# Altium PCB dongle.PcbDoc
Units mm, origin at the board's own origin, x right, y up, seen from the top; angles counter-clockwise.
Board outline 19 x 25 mm, 4 copper layers (Top Layer, Int1 (GND), Int2 (PWR), Bottom Layer), stack 1.586 mm thick; 12 components, 11 nets, 64 pads, 74 vias.
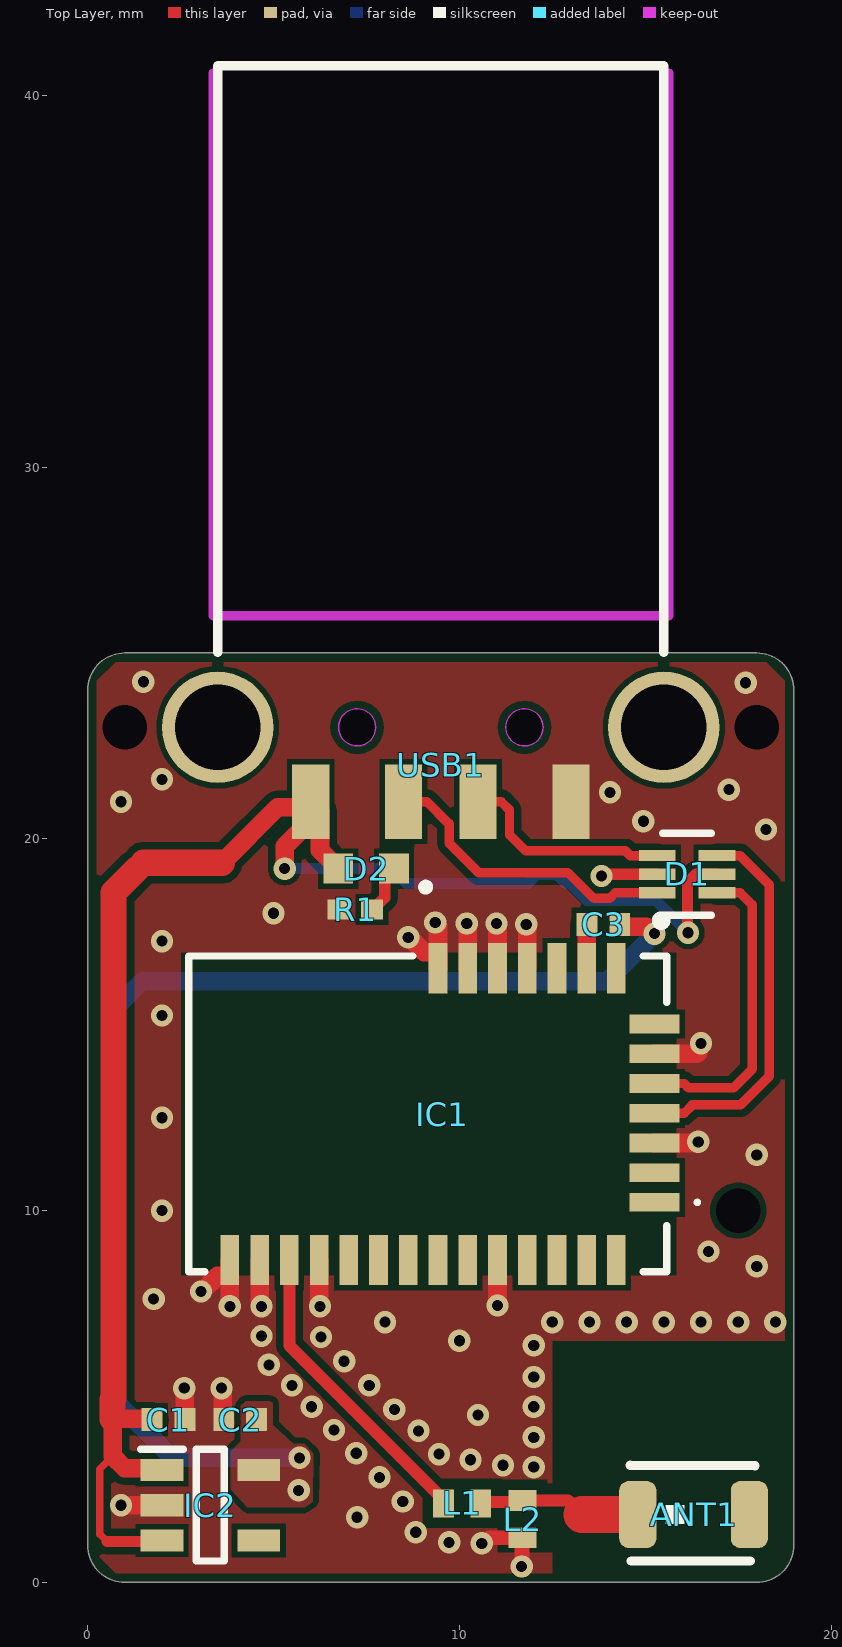
[diagram p0: Top Layer view]
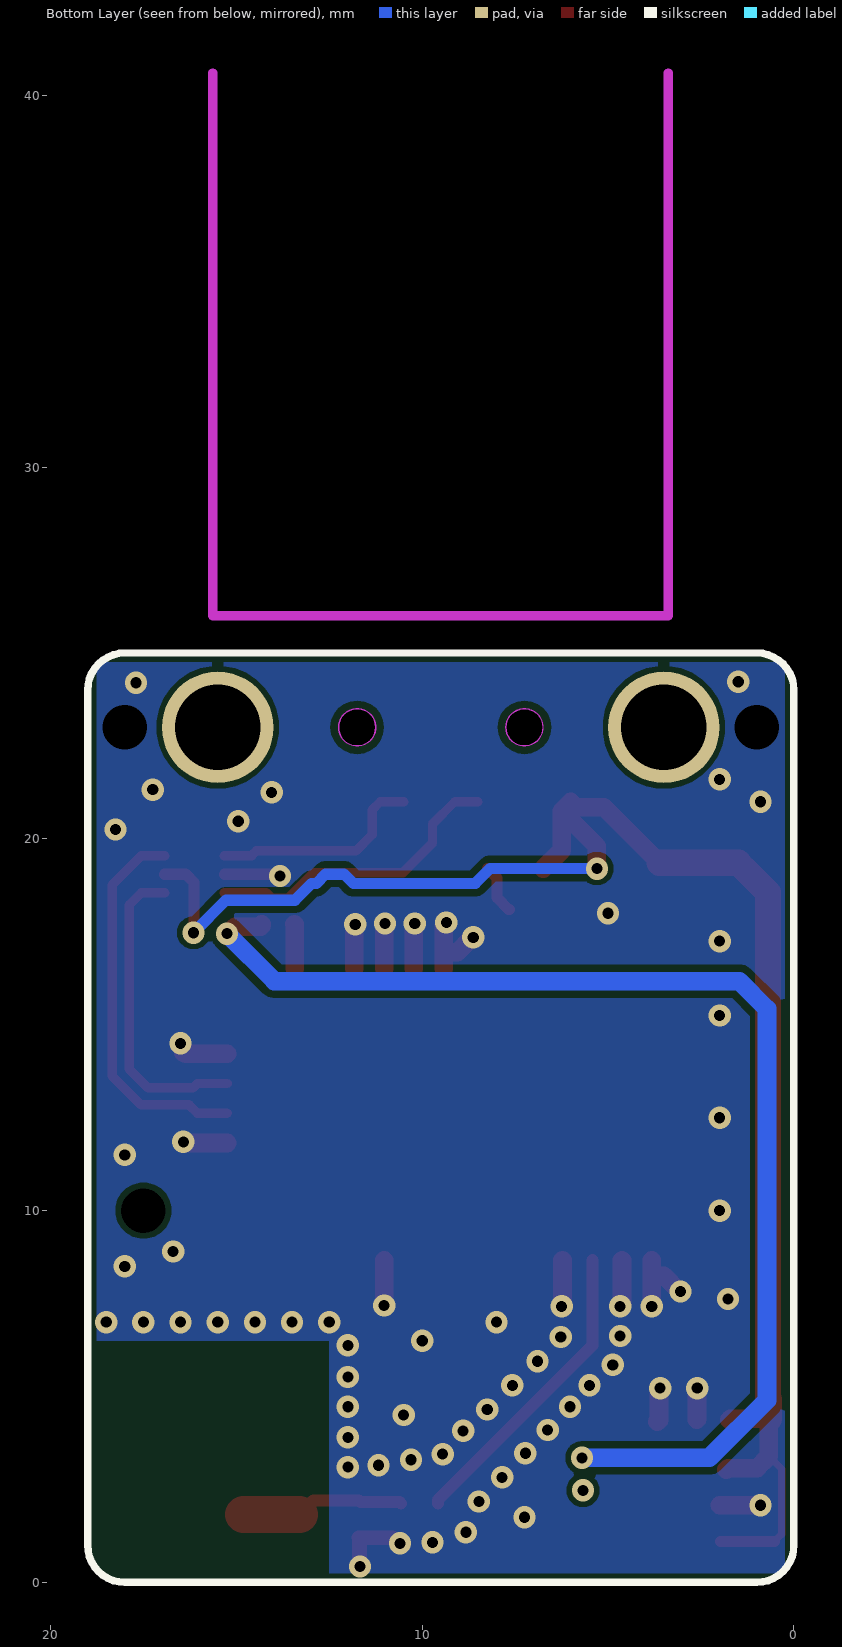
[diagram p1: Bottom Layer view, seen from below]
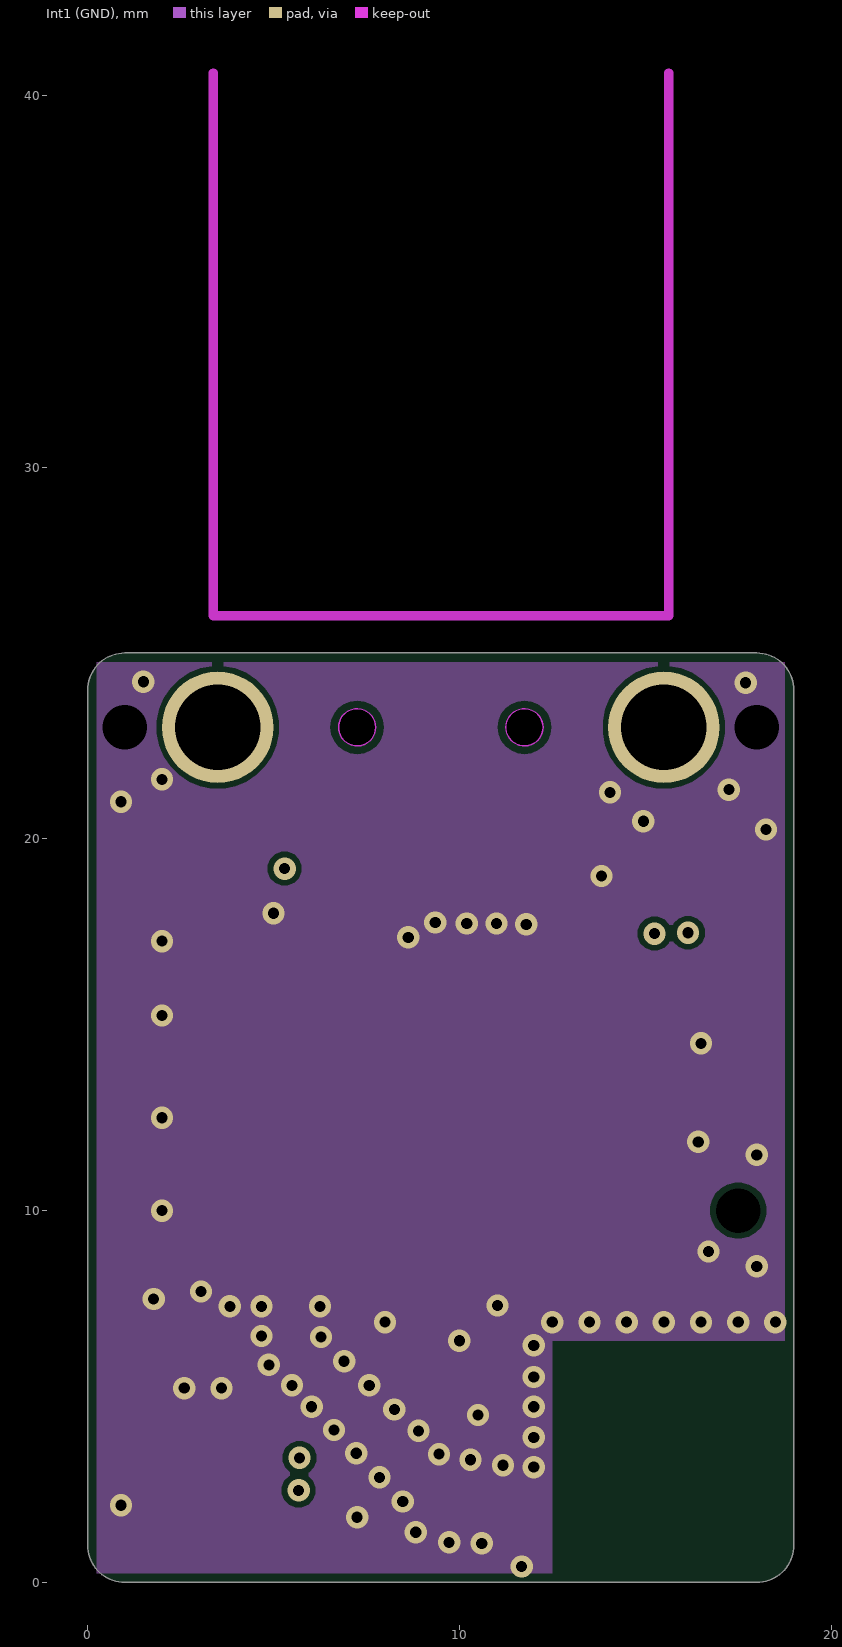
[diagram p2: Int1 (GND)]
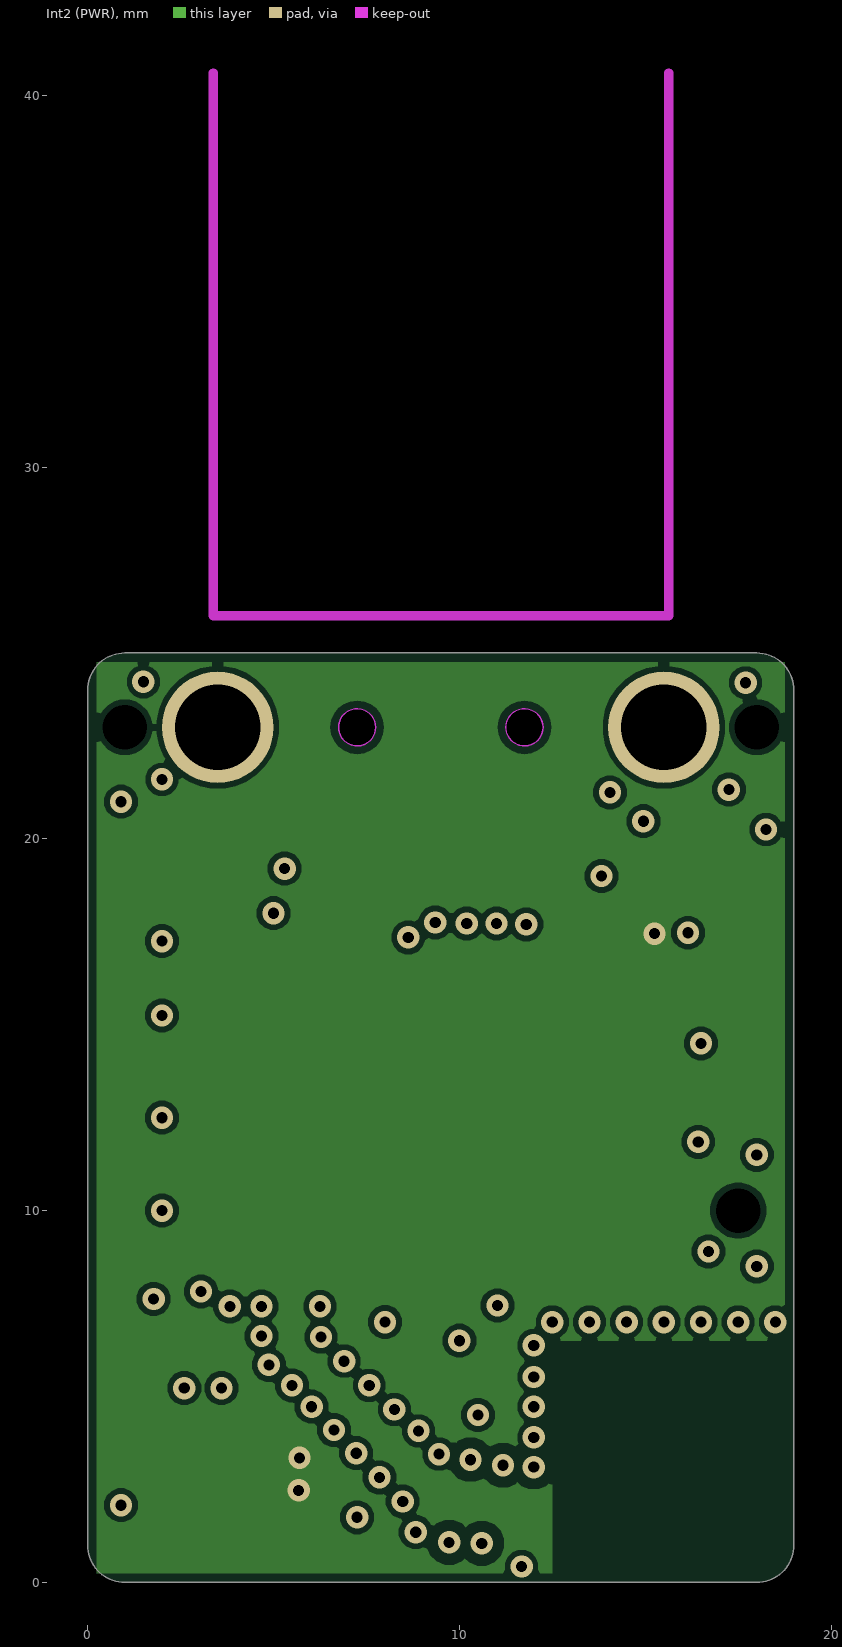
[diagram p3: Int2 (PWR)]
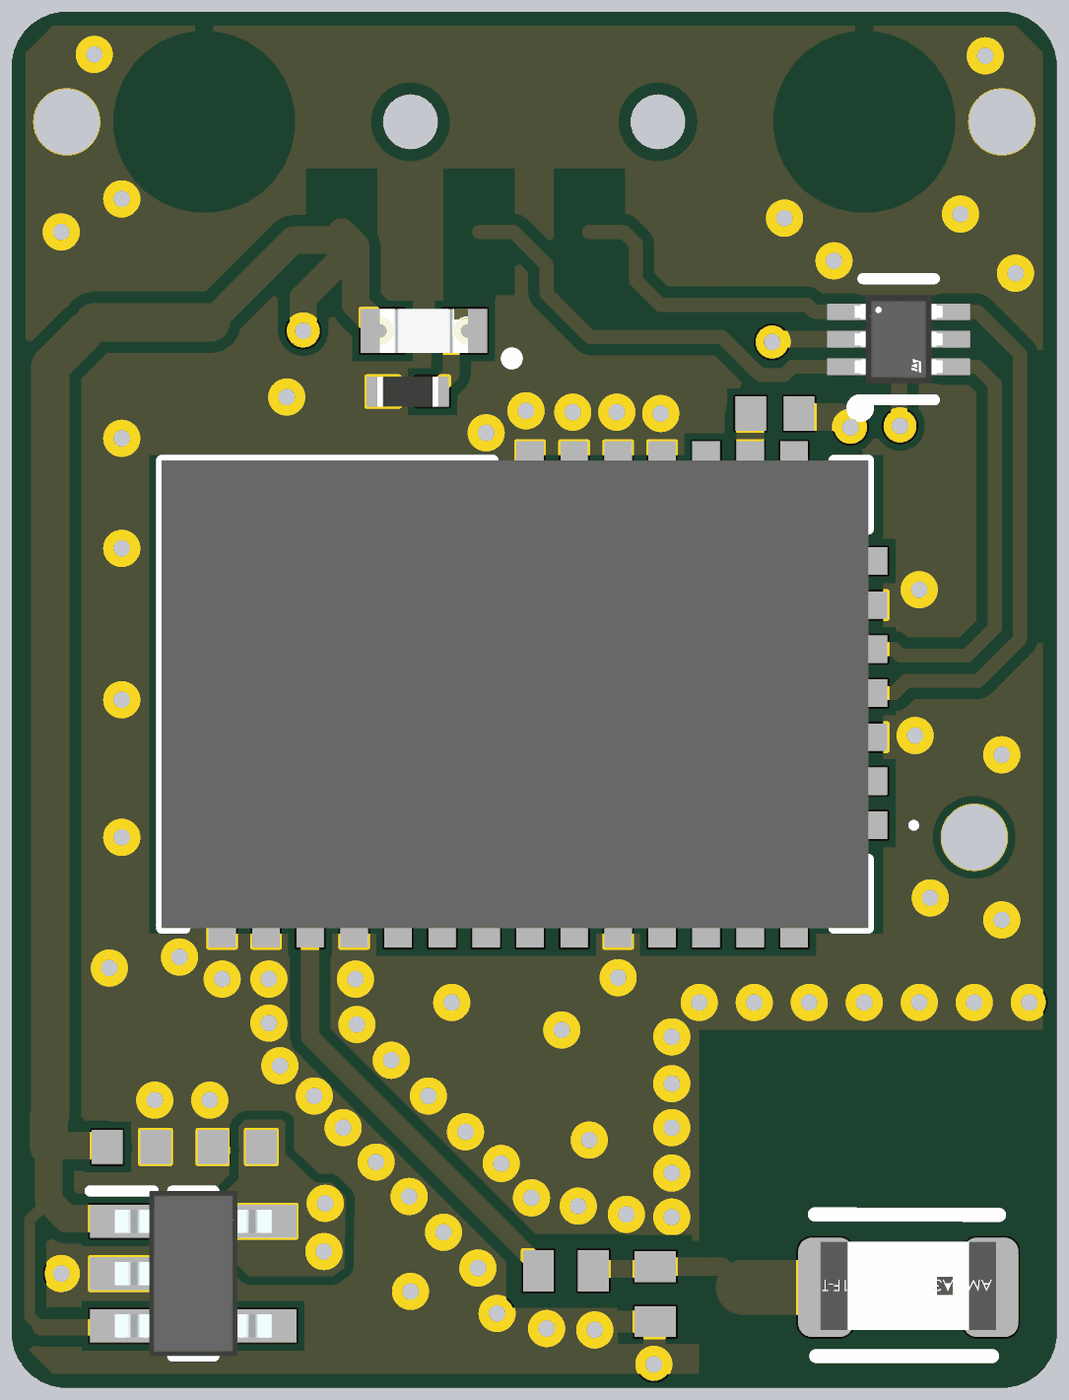
[diagram p4: 3D render of the assembled board from above, using the file's embedded part models]

## Layer stack, top to bottom
Top Solder: solder mask 0.0305, SM-001, Dk 4
Top Layer: signal copper 0.035
Dielectric 1: prepreg 0.2104, PP-017, Dk 4.4
Int1 (GND): signal copper 0.0152
Dielectric 3: core 1.065, Core-039, Dk 4.6
Int2 (PWR): signal copper 0.0152
Dielectric 5: prepreg 0.2104, PP-017, Dk 4.4
Bottom Layer: signal copper 0.035
Bottom Solder: solder mask 0.0305, SM-001, Dk 4

## Board outline
1,0 cw(c1,1) 0,1 0,24 cw(c1,24) 1,25 18,25 cw(c18,24) 19,24 19,1 cw(c18,1) 18,0

## Design rules (kind name [scope] priority, off if disabled: settings)
Clearance Clearance_2 [WithinRoom('ant2')] p1: gap=0.3 ignorepadtopadclearanceinfootprint=FALSE
Clearance Clearance_1 [All] p2: gap=0.15 ignorepadtopadclearanceinfootprint=FALSE except(0.2: Arc-Fill Arc-Poly Arc-Region Track-Fill Track-Poly Track-Region)
Clearance [WithinRoom('ant trace')] p3: gap=0.3 ignorepadtopadclearanceinfootprint=FALSE
DiffPairsRouting [OnLayer('Top Layer') And InDifferentialPairClass('All Differential Pairs')] p1: maxlimit=0.203 minlimit=0.127 mostfreqgap=0.203 toplayer_mingap=0.203 toplayer_minwidth=0.254 toplayer_maxwidth=0.254 toplayer_prefwidth=0.254 midlayer1_maxgap=0.127 midlayer1_prefgap=0.127 midlayer1_minwidth=0.13 midlayer1_maxwidth=0.13 midlayer1_prefwidth=0.13 midlayer2_maxgap=0.127 midlayer2_prefgap=0.127 midlayer2_minwidth=0.13 midlayer2_maxwidth=0.13 midlayer2_prefwidth=0.13 bottomlayer_mingap=0.203 bottomlayer_minwidth=0.254 bottomlayer_maxwidth=0.254 bottomlayer_prefwidth=0.254 impedanceprofiledriven=TRUE impedanceprofileid={29E2D125-2174-46EB-AF4F-C05ED475AF45} impedanceprofilevalue=90.000000 maxuncoupledlength=12.7
DiffPairsRouting DiffPairsRouting_1 [All] p2: maxlimit=0.254 minlimit=0.254 mostfreqgap=0.254 toplayer_minwidth=0.381 toplayer_maxwidth=0.381 toplayer_prefwidth=0.381 midlayer1_minwidth=0.381 midlayer1_maxwidth=0.381 midlayer1_prefwidth=0.381 midlayer2_minwidth=0.381 midlayer2_maxwidth=0.381 midlayer2_prefwidth=0.381 bottomlayer_minwidth=0.381 bottomlayer_maxwidth=0.381 bottomlayer_prefwidth=0.381 maxuncoupledlength=12.7
HoleToHoleClearance [All] p1: gap=0.45 allowstackedmicrovias=TRUE
MinimumSolderMaskSliver [All] p1: minsoldermaskwidth=0.1
PolygonConnect [All] p1: connectstyle=Direct reliefconductorwidth=0.254 reliefentries=4 polygonreliefangle="90 Angle" airgapwidth=0.254
RoomDefinition ant2 [InComponentClass('Components Class1') vs False] p1: confinementstyle=ConfineIn formatcopy=TRUE lockcomponents=FALSE outline 9,3.25 9,0.75 12.45,0.75 12.5,0.8 12.5,3.375 9.125,3.375
RoutingVias [All] p1: holewidth=0.711 width=1.27 viastyle="Through Hole" minholewidth=0.711 minwidth=1.27 maxholewidth=0.711 maxwidth=1.27
SilkToSolderMaskClearance [IsPad] p1: minsilkscreentomaskgap=0.15 clearancetoexposedcopper=TRUE
SolderMaskExpansion [All] p1: expansion=0.038 istentingtop=FALSE
SupplyNets "Schematic Supply Nets_3" [InNet('VIN')] p1: voltage=0.000
SupplyNets "Schematic Supply Nets_2" [InNet('3V3')] p2: voltage=0.000
SupplyNets "Schematic Supply Nets" [InNet('GND')] p3: voltage=0.000
Width [All] p1: maxlimit=2 minlimit=0.1 preferedwidth=0.254
26 further rules are at their usual default settings.

## Classes and differential pairs
differential pair USB: +USB_P -USB_N
differential pair USB_IN: +USB_IN_P -USB_IN_N

## Components (designator, comment, footprint, x,y, rotation, side; value= is the part's Value field where it differs from the comment)
ANT1 "2.4GHz antenna" "2.4GHz antenna" 16.35,1.825 r0 top locked
C1 "1uF" "0402 capacitor" 2.175,4.375 r0 top
C2 "1uF" "0402 capacitor" 4.1,4.375 r180 top
C3 "100nF" "0402 capacitor" 13.875,17.7 r0 top
D1 "USBLC6-2P6" FP-SOT-666-MFG 16.125,19.05 r0 top
D2 "WLED" LED_KT-0603R 7.492,19.201 r180 top
IC1 "BT850-ST" BT850-ST 9.15,12.6 r180 top
IC2 "AP2112K-3.3TRG1" SOT95P285X140-5N 3.3,2.075 r0 top
L1 "9nH" 0402INDUCTOR 10.075,2.125 r0 top
L2 "11nH" 0402INDUCTOR 11.7,1.7 r90 top
R1 "220" "0402 resistor" 7.2,18.1 r180 top
USB1 "USB A CONNECTOR" "USB A CONNECTOR RECESSED" 9.38,32.707 r0 top

## Footprints (in the part's own frame and the unit in brackets; to place one, negate y for a bottom-side part, rotate by r counter-clockwise, add the part's x,y. Pads: shape width x height; smd on the part's side, far side on the other; paste and mask are expansions set on the pad)
"2.4GHz antenna" [mm]
  rrect50% 1x1.8 smd: 1(-1.55,0) 2(1.45,0)
  silkscreen extent -1.75,-1.25 1.6,1.33, body extent -1.65,-0.78 1.55,0.82, height 1.21
"0402 capacitor" [mm] "Chip Capacitor, 2-Leads, Body 1.00x0.50mm, IPC Medium Density"
  rect 0.56x0.62 smd: 1(-0.44,0) 2(0.44,0)
  body extent -0.53,-0.28 0.53,0.27, height 0.5
"0402 resistor" [mm] "Chip Resistor, 2-Leads, Body 1.00x0.50mm, IPC Medium Density"
  rect 0.6x0.55 smd: 1(-0.45,0) 2(0.45,0)
  body extent -0.55,-0.28 0.55,0.28, height 0.4
0402INDUCTOR [mm] "Chip Inductor, 2-Leads, Body 1.10x0.60mm, IPC Medium Density"
  rect 0.56x0.75 smd: 1(-0.5,0) 2(0.5,0)
  body extent -0.6,-0.35 0.6,0.35, height 0.64
BT850-ST [mm]
  rect 1.35x0.5 smd: 1(-6.095,2.38) 2(-6.095,1.58) 3(-6.095,0.78) 4(-6.095,-0.02) 5(-6.095,-0.82) 6(-6.095,-1.62) 7(-6.095,-2.42)
  rect 0.5x1.35 smd: 8(-5.075,-3.92) 9(-4.275,-3.92) 10(-3.475,-3.92) 11(-2.675,-3.92) 12(-1.875,-3.92) 13(-1.075,-3.92) 14(-0.275,-3.92) 15(5.325,3.93) 16(4.525,3.93) 17(3.725,3.93) 18(2.925,3.93) 19(2.125,3.93) 20(1.325,3.93) 21(0.525,3.93) 22(-0.275,3.93) 23(-1.075,3.93) 24(-1.875,3.93) 25(-2.675,3.93) 26(-3.475,3.93) 27(-4.275,3.93) 28(-5.075,3.93)
  silkscreen extent -7.3,-4.25 6.43,4.25, body extent -6.43,-4.25 6.43,4.25, height 3.3
FP-SOT-666-MFG [mm]
  rect 0.99x0.3 smd paste+0 mask+0: 1(-0.805,-0.5) 2(-0.805,0) 3(-0.805,0.5) 4(0.805,0.5) 5(0.805,0) 6(0.805,-0.5)
  silkscreen extent -0.82,-1.37 0.65,1.1, body extent -0.8,-0.8 0.8,0.8, height 0.6
LED_KT-0603R [mm]
  rect 0.8x0.8 smd: A(0.75,0) C(-0.75,0)
  silkscreen extent -1.7,0.4 -1.5,0.6, body extent -0.8,-0.4 0.8,0.4, height 0.65
SOT95P285X140-5N [mm]
  rect 1.15x0.6 smd: 1(-1.3,0.95) 2(-1.3,0) 3(-1.3,-0.95) 4(1.3,-0.95) 5(1.3,0.95)
  silkscreen extent -1.88,-1.5 0.38,1.5, body extent -1.43,-1.5 1.43,1.5, height 1.4
"USB A CONNECTOR RECESSED" [mm]
  rect 1x2 smd paste-100 mask+0.05: 1(-3.38,-11.707) 2(-0.88,-11.707) 3(1.12,-11.707) 4(3.62,-11.707)
  round 3 hole 2.3 paste-2539.97 mask+0.05: 5(6.12,-9.707) 6(-5.88,-9.707)
  Keep-Out Layer board cut-out: -2.63,-9.707 -2.58,-9.49 -2.442,-9.316 -2.241,-9.219 -2.019,-9.219 -1.818,-9.316 -1.679,-9.49 -1.63,-9.707 -1.63,-9.707 -1.679,-9.924 -1.818,-10.098 -2.019,-10.194 -2.241,-10.194 -2.442,-10.098 -2.58,-9.924 -2.63,-9.707
  Keep-Out Layer board cut-out: 1.87,-9.707 1.919,-9.49 2.058,-9.316 2.259,-9.219 2.481,-9.219 2.682,-9.316 2.82,-9.49 2.87,-9.707 2.87,-9.707 2.82,-9.924 2.682,-10.098 2.481,-10.194 2.259,-10.194 2.058,-10.098 1.919,-9.924 1.87,-9.707
  Keep-Out Layer circle w0.025: c-2.13,-9.707 r0.5
  Keep-Out Layer circle w0.025: c2.37,-9.707 r0.5
  Keep-Out Layer region: -2.63,-9.707 -2.58,-9.49 -2.442,-9.316 -2.241,-9.219 -2.019,-9.219 -1.818,-9.316 -1.679,-9.49 -1.63,-9.707 -1.63,-9.707 -1.679,-9.924 -1.818,-10.098 -2.019,-10.194 -2.241,-10.194 -2.442,-10.098 -2.58,-9.924 -2.63,-9.707
  Keep-Out Layer region: 1.87,-9.707 1.919,-9.49 2.058,-9.316 2.259,-9.219 2.481,-9.219 2.682,-9.316 2.82,-9.49 2.87,-9.707 2.87,-9.707 2.82,-9.924 2.682,-10.098 2.481,-10.194 2.259,-10.194 2.058,-10.098 1.919,-9.924 1.87,-9.707
  Keep-Out Layer lines w0.254: -5.997,-6.707 6.258,-6.707 ; -5.997,-6.707 -5.997,7.895 -5.997,-6.707 ; -5.997,-6.707 6.258,-6.707 ; 6.258,-6.707 6.258,7.895 6.258,-6.707
  silkscreen extent -5.88,-7.68 6.12,8.09

## Part data
C1 C2 C3: library part "0402 capacitor", "0402 smd capacitor"
D1: library part CMP-12225-000058-1, "TVS DIODE 5.25V 17V SOT666", Breakdown Voltage=6V, Capacitance=3.5pF, Case/Package=SOT-666, Clamping Voltage=17V, Leakage Current=150nA, Max Operating Temperature=125°C, Min Operating Temperature=-40°C, Operating Supply Voltage=5V, Package Quantity=1, Peak Pulse Current=5A, Power Line Protection=Yes, Test Current=1mA, Contact Plating=Tin, Depth=1.3mm, Direction=Unidirectional, Element Configuration=Dual, ESD Protection=Yes, Height=0.6mm, Lead Free="Lead Free", Length=1.7mm, Max Breakdown Voltage=6V, Max Reverse Leakage Current=150nA, Min Breakdown Voltage=6V, Mount="Surface Mount", Number of Bidirectional Channels=2, Number of Channels=2, Number of Elements=1, Number of Pins=6, Packaging="Tape and Reel", Polarity=Unidirectional, Radiation Hardening=No, REACH SVHC="No SVHC", Reverse Breakdown Voltage=6V, Reverse Standoff Voltage=5V, Termination=SMD/SMT, Width=1.3mm, Working Voltage=5V
D2: library part KT-0603R, "Red 0603 Light Emitting Diodes", Package=Package, Check_prices=https://www.snapeda.com/parts/KT-0603R/Hubei+KENTO+Elec/view-part/?ref=eda, MF="Hubei KENTO Elec", MP=KT-0603R, SnapEDA_Link=https://www.snapeda.com/parts/KT-0603R/Hubei+KENTO+Elec/view-part/?ref=snap
IC2: "Integrated Circuit", Manufacturer_Name="Diodes Incorporated", Mouser Part Number=621-AP2112K-3.3TRG1, Arrow Part Number=AP2112K-3.3TRG1, Arrow Price/Stock=https://www.arrow.com/en/products/ap2112k-3.3trg1/diodes-incorporated?utm_currency=USD&region=nac, Datasheet Link=https://www.diodes.com//assets/Datasheets/AP2112.pdf, Height=1.4mm, Manufacturer_Part_Number=AP2112K-3.3TRG1, Mouser Price/Stock=https://www.mouser.co.uk/ProductDetail/Diodes-Incorporated/AP2112K-3.3TRG1?qs=x6A8l6qLYDDPYHosCdzh%2FA%3D%3D
L1 L2: library part "0402 inductor"
R1: library part "0402 resistor"
USB1: library part "USB A CONNECTOR RECESSED"

## Free pads (board coordinates)
  round 0 hole 1.2: 17(1,23) 17(17.5,10) 17(18,23)

## Via types
v1: diameter 0.6, hole 0.3, Top Layer to Bottom Layer, 74 vias

## Nets (pads, with @x,y where several pads share a name; then routed paths per layer and width w, separated by ;. In a path a pad name is that pad's centre, name@x,y a point inside that pad or via, vN(x,y) a via of type N, cw(c..) or ccw(c..) an arc to the next point about the centre after c; other vN are vias at no path point)
3V3: C2.1 C3.2 IC2.5 | length 32.6
  Top Layer w0.5: C3.2 14.315,17.67 14.345,17.64 15.033,17.64 15.223,17.45 v1(15.25,17.45)
  Bottom Layer w0.5: v1(5.7,3.35) 2.275,3.35 0.725,4.9 0.725,15.425 1.475,16.175 13.975,16.175 v1(15.25,17.45)
  other v1: 5.675,2.475
ANT: IC1.17 L1.1 | length 8.3
  Top Layer w0.324: IC1.17 5.425,6.37 9.575,2.22 L1.1
GND: C1.2 C2.2 D1.2 IC1.3 IC1.6 IC1.11 IC1.12 IC1.13 IC1.14 IC1.15 IC1.16 IC1.18 IC1.24 IC2.2 L2.1 pad.17@1,23 pad.17@18,23 R1.2 USB1.4 | length 21
  Top Layer w0.3: v1(13.825,19) 13.875,19.05 D1.2
  Top Layer w0.4: v1(10.6,1.05) 10.654,1.05 10.804,1.2 L2.1 11.688,1.188 11.688,0.437 v1(11.675,0.425)
  Top Layer w0.5: v1(0.9,2.075) IC2.2 ; v1(2.6,5.225) 2.608,5.218 2.608,4.383 C1.2 ; v1(3.05,7.825) 3.077,7.825 3.497,8.245 IC1.15@3.825,8.245 ; v1(3.6,5.225) 3.6,5.198 3.63,5.168 3.63,4.365 C2.2@3.68,4.315 ; v1(3.825,7.425) IC1.15@3.825,8.245 ; IC1.15 IC1.15@3.825,8.245 ; IC1.16 4.625,7.502 4.675,7.452 v1(4.675,7.425) ; IC1.18 6.225,7.477 6.25,7.452 v1(6.25,7.425) ; v1(8.625,17.35) 8.652,17.35 9.057,16.945 9.425,16.945 IC1.14 9.425,17.648 9.35,17.723 v1(9.35,17.75) ; v1(10.2,17.725) 10.2,17.698 10.225,17.673 IC1.13 ; v1(11,17.725) 11,17.698 11.025,17.673 IC1.12 ; v1(11.025,7.45) 11.025,8.245 IC1.24 ; v1(11.8,17.7) 11.8,17.673 11.825,17.648 IC1.11 ; IC1.3 16.368,11.82 16.398,11.85 v1(16.425,11.85) ; IC1.6 16.368,14.22 16.398,14.25 v1@16.425,14.25
  other v1: 9.725,1.075 8.825,1.35 7.25,1.75 8.475,2.175 7.85,2.825 12,3.1 11.175,3.15 10.3,3.3 9.45,3.45 7.225,3.475 12,3.9 8.9,4.075 6.625,4.1 10.5,4.5 8.25,4.65 6.025,4.725 12,4.725 5.5,5.3 7.575,5.3 12,5.525 4.875,5.85 6.9,5.95 12,6.375 10,6.5 6.275,6.6 4.675,6.625 8,7 12.5,7 13.5,7 14.5,7 15.5,7 16.5,7 17.5,7 18.5,7 1.775,7.625 18,8.5 16.7,8.9 2,10 18,11.5 2,12.5 16.5,14.5 2,15.25 2,17.25 5,18 18.25,20.25 14.95,20.475 0.9,21 14.05,21.25 17.25,21.325 2,21.6 17.7,24.2 1.5,24.225
NetANT1_1: ANT1.1 L1.2 L2.2 | length 4.4
  Top Layer w0.324: L1.2 10.612,2.163 11.663,2.163 L2.2 12.5,2.2 12.525,2.2 12.925,2.2 13.3,1.825
  Top Layer w1: 13.3,1.825 ANT1.1
NetC3_1: C3.1 IC1.9 | length 1.2
  Top Layer w0.5: IC1.9 13.425,17.69 C3.1
NetD2_C: D2.C R1.1 | length 1.4
  Top Layer w0.3: R1.1 7.675,18.1 7.992,18.417 7.992,18.951 D2.C
USB_IN_N: D1.1 USB1.2 | length 8.3
  Top Layer w0.254: USB1.2 9.127,21 9.723,20.404 9.723,19.885 10.517,19.092 12.917,19.092 13.586,18.423 13.602,18.423 13.625,18.4 14.041,18.4 14.191,18.55 D1.1
USB_IN_P: D1.3 USB1.3 | length 5.8
  Top Layer w0.254: USB1.3 11.127,21 11.348,20.779 11.348,20.111 11.784,19.675 14.466,19.675 14.591,19.55 D1.3
USB_N: D1.6 IC1.5 | length 8.4
  Top Layer w0.254: IC1.5 16.047,13.42 16.167,13.3 17.375,13.3 17.875,13.8 17.875,18.227 17.552,18.55 D1.6
USB_P: D1.4 IC1.4 | length 10.4
  Top Layer w0.254: IC1.4 16.047,12.62 16.27,12.843 17.564,12.843 18.332,13.611 18.332,18.77 17.552,19.55 D1.4
VIN: C1.1 D1.5 D2.A IC2.1 IC2.3 USB1.1 | length 46
  Top Layer w0.2: 0.525,1.1 0.325,1.3 0.325,3.05 0.668,3.393 0.675,3.393 ; IC2.3@1.975,1.1 IC2.3
  Top Layer w0.3: 0.525,1.1 IC2.3@1.975,1.1 ; v1(16.15,17.475) 16.135,17.49 16.135,18.824 16.361,19.05 D1.5
  Top Layer w0.5: 1.333,19.193 1.498,19.358 ; C1.1 1.71,4.4 0.675,4.4 0.675,3.393 0.993,3.075 1.775,3.075 IC2.1@1.825,3.025 ; 3.617,19.358 5.11,20.85 USB1.1@6.04,20.85 ; v1(5.3,19.2) 5.3,19.8 6,20.5 USB1.1 6.25,20.75 6.25,19.694 D2.A
  Top Layer w0.7: 0.675,4.4 0.675,4.925 ; 0.701,4.95 0.701,18.561 1.333,19.193 ; 1.498,19.358 3.617,19.358
  Bottom Layer w0.3: v1(5.3,19.2) 8.175,19.2 8.575,18.8 11.851,18.8 12.101,19.05 12.599,19.05 12.849,18.8 12.975,18.8 13.425,18.35 15.275,18.35 v1(16.15,17.475)
pads on no net: ANT1.2 IC1.1 IC1.2 IC1.7 IC1.8 IC1.10 IC1.19 IC1.20 IC1.21 IC1.22 IC1.23 IC1.25 IC1.26 IC1.27 IC1.28 IC2.4 USB1.5 USB1.6

## Polygon pours and split planes (outlines as drawn)
GND on Top Layer "GND_L01_P014" (solid, pour order 14): 5.75,6.5 11.353,0.25 12.5,0.25 12.5,6.5 18.75,6.5 18.75,24.75 0.25,24.75 0.25,0.25 11.353,0.25
3V3 on Top Layer "3V3_L01_P012" (solid, pour order 12): 3.85,3.525 4.125,3.8 4.125,4.75 4.25,4.875 4.9,4.875 4.975,4.837 4.975,4.246 5.525,3.725 5.825,3.725 6.075,3.475 6.05,2.175 5.842,2.026 4.3,2.026 3.85,2.5
3V3 on Int2 (PWR) "3V3_L03_P001" (solid, pour order 1): 0.25,0.25 12.5,0.25 12.5,6.5 18.75,6.5 18.75,24.75 0.25,24.75
GND on Int1 (GND) "GND_L02_P000" (solid, pour order 0): 0.25,0.25 12.5,0.25 12.5,6.5 18.75,6.5 18.75,24.75 0.25,24.75
GND on Bottom Layer "GND_L04_P002" (solid, pour order 2): 0.25,0.25 12.5,0.25 12.5,6.5 18.75,6.5 18.75,24.75 0.25,24.75

## Other copper
Top Layer:
  pour cut-out: 11.005,1.793 11.042,1.831 12.5,1.831 12.5,0.8 11.025,0.8
  pour cut-out: 19,24 18,25 19,25
  pour cut-out: 0,1 1,0 0,0
  pour cut-out: 0,24 1,25 0,25
  pour cut-out: 2.5,16.945 2.5,8.25 15.848,8.25 15.848,16.945

## Silkscreen, mask and mechanical layers (free items; w line width, h text height)
Bottom Overlay:
  the board outline again, w0.2